# Altium PCB RGBW_controller.PcbDoc
Units mm, origin at the board's own origin, x right, y up, seen from the top; angles counter-clockwise.
Board outline 33 x 54 mm, 2 copper layers (Top Layer, Bottom Layer), stack 1.671 mm thick; 37 components, 25 nets, 136 pads, 0 vias.
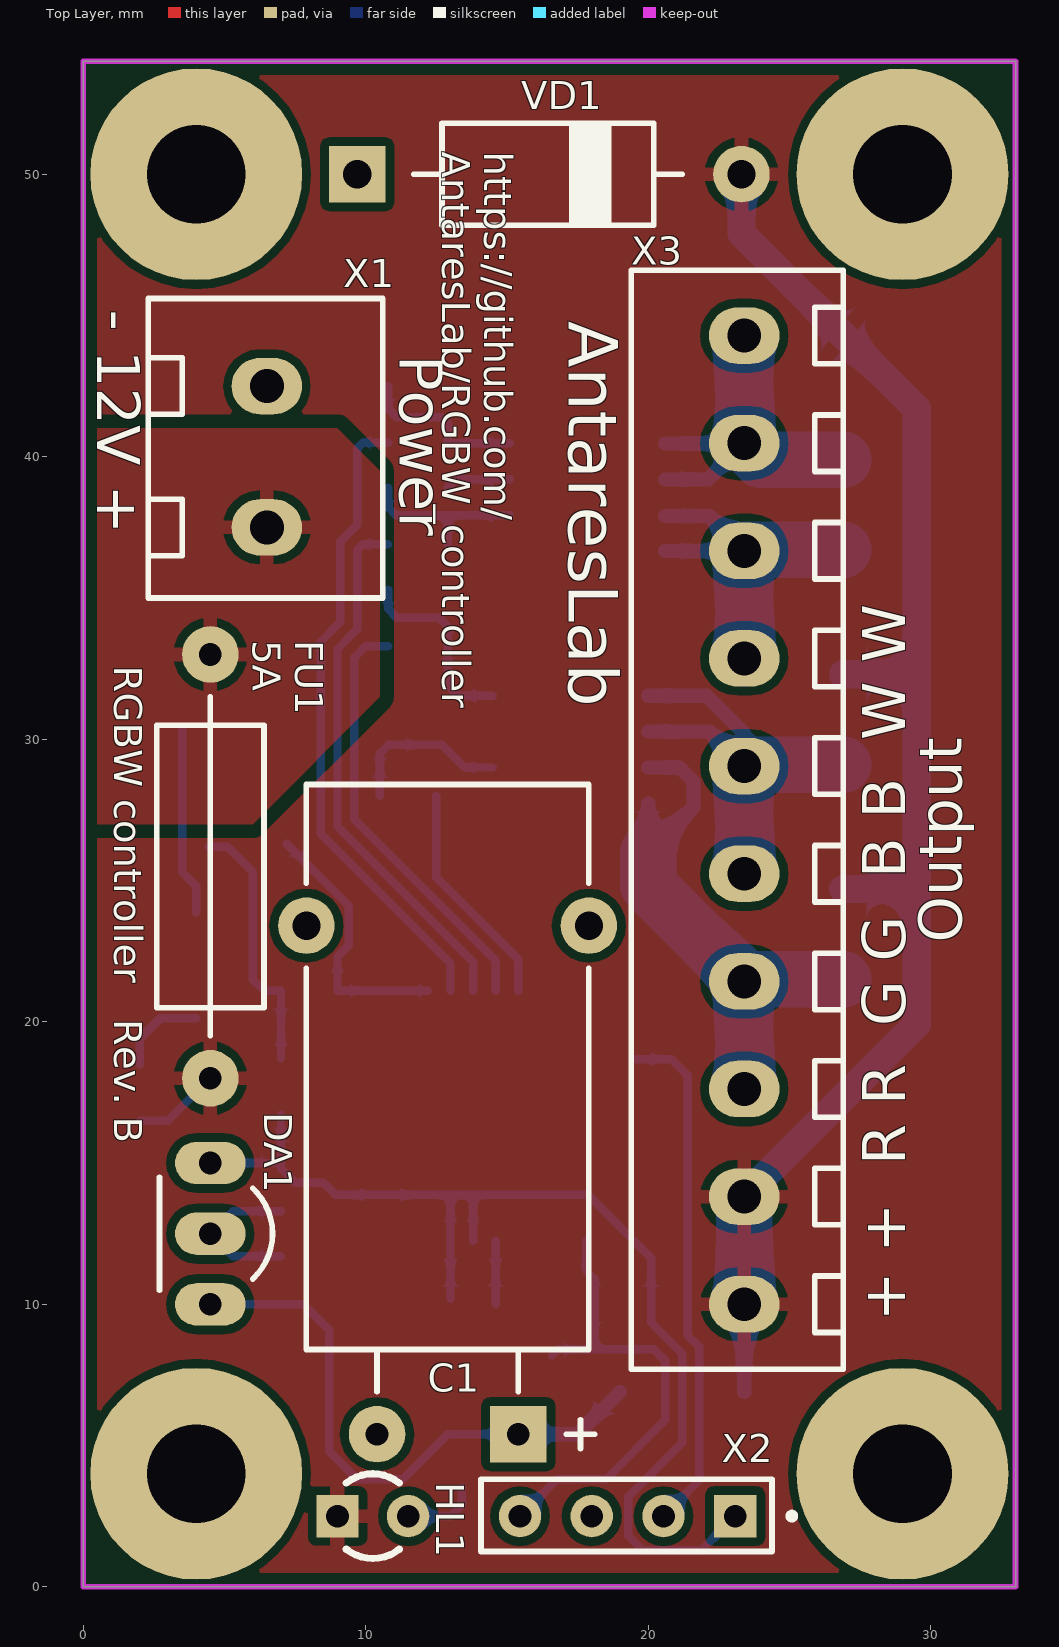
[diagram p0: Top Layer view]
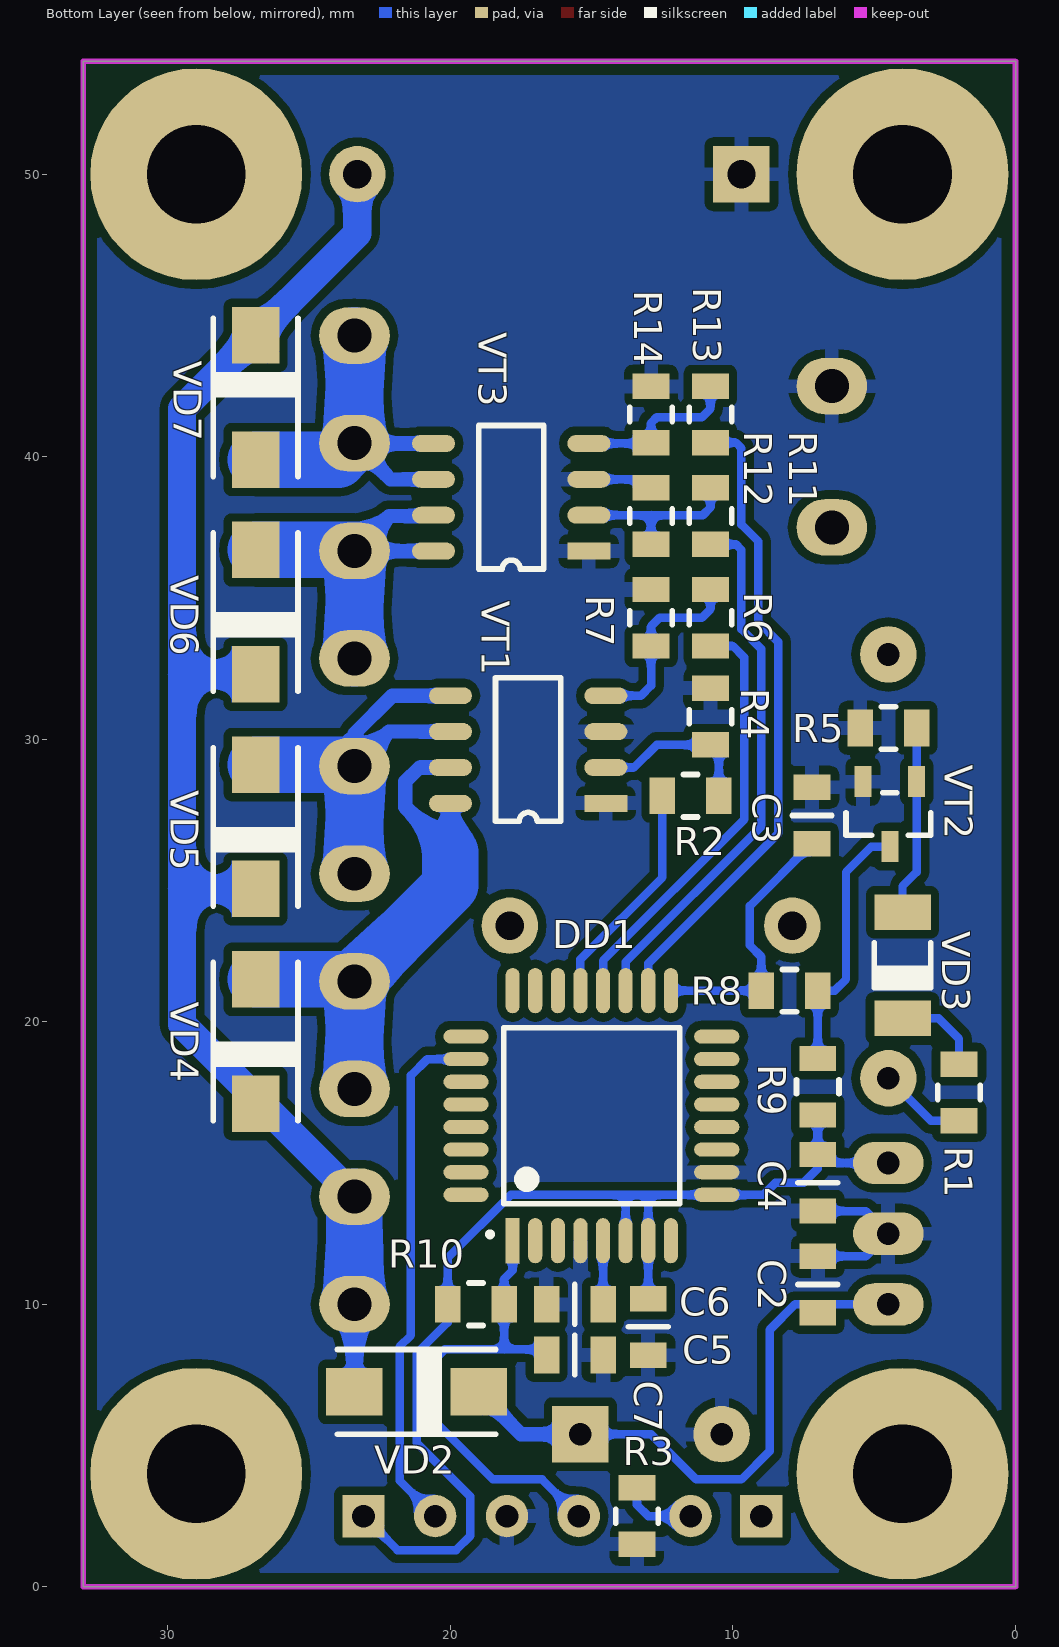
[diagram p1: Bottom Layer view, seen from below]

## Layer stack, top to bottom
Top Solder: solder mask 0.0102, Solder Resist, Dk 3.5
Top Layer: signal copper 0.0356
Dielectric 1: dielectric 1.6, FR-4, Dk 4.8
Bottom Layer: signal copper 0.0356
Bottom Solder: solder mask 0.0102, Solder Resist, Dk 3.5

## Board outline
0,0 0,54 33,54 33,0

## Design rules (kind name [scope] priority, off if disabled: settings)
Clearance [All] p1: gap=0.3 ignorepadtopadclearanceinfootprint=FALSE except(0.5: Poly-Poly)
PlaneConnect [All] p1: planeconnectstyle=Relief reliefexpansion=0.5 reliefentries=4 reliefconductorwidth=0.5 reliefairgap=0.3
PolygonConnect [All] p1: connectstyle=Relief reliefconductorwidth=0.5 reliefentries=4 polygonreliefangle="90 Angle" airgapwidth=0.3
RoutingVias [All] p1: holewidth=0.711 width=1.27 viastyle="Through Hole" minholewidth=0.711 minwidth=1.27 maxholewidth=0.711 maxwidth=1.27
SolderMaskExpansion [All] p1: expansion=0.102
Width [All] p1: maxlimit=10 minlimit=0.254 preferedwidth=0.254
29 further rules are at their usual default settings.

## Components (designator, comment, footprint, x,y, rotation, side; value= is the part's Value field where it differs from the comment)
C2 "100nF" C0805 7,10.7 r90 bottom
C3 "100nF" C0805 7.2,27.3 r90 bottom
C4 "100nF" C0805 7,14.3 r270 bottom
C5 "100nF" C0805 15.6,8.2 r0 bottom
C6 "1uF" C0805 15.6,10 r0 bottom
C7 "100nF" C0805 13,9.2 r90 bottom
DA1 "78L05" "TO92 line" 4.5,12.5 r270 top
DD1 "STM8S105K4T6" TQFP32 17.8,12.425 r90 bottom
FU1 "5A" "Fuse 4x10" 4.5,33 r270 top
HL1 "Power" "LED 3mm green" 9,2.5 r0 top
R1 "1k" R0805 2,17.5 r90 bottom
R2 "10" R0805 11.5,28 r180 bottom
R3 "2.2k" R0805 13.4,2.5 r90 bottom
R4 "10k" R0805 10.8,30.8 r270 bottom
R5 "1k" R0805 4.5,30.4 r180 bottom
R6 "10" R0805 10.8,34.3 r90 bottom
R7 "10k" R0805 12.9,34.3 r270 bottom
R8 "1k" R0805 8,21.1 r0 bottom
R9 "10k" R0805 7,17.7 r270 bottom
R10 "10k" R0805 19.1,10 r0 bottom
R11 "10" R0805 10.8,37.9 r90 bottom
R12 "10k" R0805 12.9,37.9 r270 bottom
R13 "10" R0805 10.8,41.5 r90 bottom
R14 "10k" R0805 12.9,41.5 r270 bottom
VD1 "P6KE18A" DO15 9.7,50 r0 top
VD2 "S1M" SMA 21.2,6.9 r180 bottom
VD3 "9V1" SOD80 4,22 r270 bottom
VD4 "SS34L" SMA 26.9,19.3 r270 bottom
VD5 "SS34L" SMA 26.9,26.9 r270 bottom
VD6 "SS34L" SMA 26.9,34.5 r270 bottom
VD7 "SS34L" SMA 26.9,42.1 r90 bottom
VT1 "FDS9926A" SO8 14.5,27.73 r0 bottom
VT2 "BC817" SOT23-3 3.5,28.4 r270 bottom
VT3 "FDS9926A" SO8 15.1,36.66 r0 bottom
X1 "Power" DG301-5,0-2P 6.5,42.5 r270 top
X2 "SWIM" PLS4 23.08,2.5 r180 top
X3 "Output" DG380-3,81-10P 23.4,10 r90 top

## Footprints (in the part's own frame and the unit in brackets; to place one, negate y for a bottom-side part, rotate by r counter-clockwise, add the part's x,y. Pads: shape width x height; smd on the part's side, far side on the other; paste and mask are expansions set on the pad)
C0805 [mm]
  rect 0.9x1.3 smd: 1(-1,0) 2(1,0)
  silkscreen extent 0,-0.7 0,0.7, body extent -1,-0.63 1,0.63, height 0.8
DG301-5,0-2P [mm]
  oval 2x2.5 hole 1.2: 1(0,0) 2(5,0)
  silkscreen extent -3.1,-4.2 7.5,4.1, body extent -3.1,-4.2 7.5,4.1, height 10.34
DG380-3,81-10P [mm]
  oval 2x2.5 hole 1.2: 1(0,0) 2(3.81,0) 3(7.62,0) 4(11.43,0) 5(15.24,0) 6(19.05,0) 7(22.86,0) 8(26.67,0) 9(30.48,0) 10(34.29,0)
  silkscreen extent -2.3,-3.5 36.6,4, body extent -2.22,-3.5 36.62,4, height 10
DO15 [mm]
  rect 2x2 hole 1: 1(0,0)
  round 2 hole 1: 2(13.6,0)
  silkscreen extent 2,-1.8 11.5,1.8, body extent -0.43,-1.76 14.03,1.8, height 3.78
"Fuse 4x10" [mm]
  round 2 hole 0.8: 1(0,0) 2(15,0)
  silkscreen extent 1.5,-1.9 13.5,1.9, body extent -0.25,-1.9 15.25,1.9, height 4.4
"LED 3mm green" [mm]
  rect 1.5x1.5 hole 0.8: 1(0,0)
  round 1.5 hole 0.8: 2(2.5,0)
  silkscreen extent 0.31,-1.5 2.19,1.5, body extent -0.75,-2 2.92,2, height 9.1
PLS4 [mm]
  rect 1.5x1.5 hole 0.8: 1(0,0)
  round 1.5 hole 0.8: 2(2.54,0) 3(5.08,0) 4(7.62,0)
  silkscreen extent -2.1,-1.3 9,1.25, body extent -1.27,-1.27 8.89,1.27, height 8.44
R0805 [mm]
  rect 0.9x1.3 smd: 1(-1,0) 2(1,0)
  silkscreen extent -0.25,-0.75 0.25,0.75, body extent -1,-0.62 1,0.63, height 0.5
SMA [mm]
  rect 2x1.68 smd: 1(-2.2,0) 2(2.2,0)
  silkscreen extent -2.8,-1.5 2.8,1.5, body extent -2.8,-1.47 2.8,1.48, height 2.7
SO8 [mm]
  rect 1.52x0.6 smd: 1(0,0)
  oval 1.52x0.6 smd: 2(0,-1.27) 3(0,-2.54) 4(0,-3.81) 5(5.5,-3.81) 6(5.5,-2.54) 7(5.5,-1.27) 8(5.5,0)
  silkscreen extent 1.59,-4.44 3.91,0.64, body extent -0.24,-4.33 5.75,0.57, height 1.6
SOD80 [mm]
  rect 1.25x2 smd: 1(-1.875,0) 2(1.875,0)
  silkscreen extent -0.8,-1.1 0.8,1, body extent -1.68,-0.8 1.68,0.74, height 1.52
SOT23-3 [mm]
  rect 1.1x0.6 smd: 1(-0.1,0) 2(-0.1,-1.9) 3(2.2,-0.95)
  silkscreen extent 0.3,-2.5 1.8,0.5, body extent -0.2,-2.5 2.3,0.5, height 1.1
"TO92 line" [mm]
  oval 1.5x2.5 hole 0.8: 1(-2.5,0) 2(0,0) 3(2.5,0)
  silkscreen extent -2,-1.8 2,2.2, body extent -2.8,-1.8 2.8,2.13, height 9.7
TQFP32 [mm]
  rect 1.6x0.5 smd: 1(-0.175,0)
  oval 1.6x0.5 smd: 2(-0.175,-0.8) 3(-0.175,-1.6) 4(-0.175,-2.4) 5(-0.175,-3.2) 6(-0.175,-4) 7(-0.175,-4.8) 8(-0.175,-5.6) 17(8.675,-5.6) 18(8.675,-4.8) 19(8.675,-4) 20(8.675,-3.2) 21(8.675,-2.4) 22(8.675,-1.6) 23(8.675,-0.8) 24(8.675,0)
  oval 0.5x1.6 smd: 9(1.45,-7.225) 10(2.25,-7.225) 11(3.05,-7.225) 12(3.85,-7.225) 13(4.65,-7.225) 14(5.45,-7.225) 15(6.25,-7.225) 16(7.05,-7.225) 25(7.05,1.65) 26(6.25,1.65) 27(5.45,1.65) 28(4.65,1.65) 29(3.85,1.65) 30(3.05,1.65) 31(2.25,1.65) 32(1.45,1.65)
  silkscreen extent 0,-5.92 7.37,0.85, body extent -0.35,-7.4 8.85,1.8, height 1.2

## Part data
C2 C3 C4 C5 C6 C7: library part C0805, "0805 SMD capacitors", Part Number=C0805
DA1: library part L78L, "Positive Linear Voltage Regulator", Part Number=L78L
DD1: "STM8 MCU with 16kB Flash", Part Number=STM8S105K4T6
FU1: library part Fuse_4x10, "PCB Leaded Fuse 4x10 15mm pitch", Part Number=Fuse_4x10
HL1: library part "LED 3mm green", "3mm DIP green LED", Part Number="LED 3mm green"
R1 R2 R3 R4 R5 R6 R7 R8 R9 R10 R11 R12 R13 R14: library part R0805, "0805 SMD 1/8W resistor", Part Number=R0805
VD1: "18V 600W THT Unidirectional Supressor", Part Number=P6KE18A
VD2: "1A Surface Mount Rectifier", Part Number=S1M
VD3: library part BZV55, "500mW SMD Zener Diode", Part Number=BZV55
VD4 VD5 VD6 VD7: "3A Low Case Schottky Barrier Diode", Part Number=SS34L
VT1 VT3: "Dual 20V 6.5A SO8 SMD n-MOSFET transistor with Rds=30mOhm", Part Number=FDS9926A
VT2: "45V 500mA SOT23-3 SMD NPN transistor with h21>100", Part Number=BC817
X1: library part DG301-5,0-2P, "2 pin Screw Terminal PCB Block", Part Number=DG301-5,0-2P
X2: "4 pin SWIM connector for STM8 MCU programming", Part Number=SWIM
X3: library part DG380-3,81-10P, "10 pin Screw Terminal PCB Block", Part Number=DG380-3,81-10P

## Free pads (board coordinates)
  round 7.5 hole 3.5: 0(4,4) 0(4,50) 0(29,4) 0(29,50)
  round 2 hole 1: 0(7.9,23.4) 0(17.9,23.4)
  rect 2x2 hole 0.8: 1(15.4,5.4)
  round 2 hole 0.8: 2(10.4,5.4)

## Nets (pads, with @x,y where several pads share a name; then routed paths per layer and width w, separated by ;. In a path a pad name is that pad's centre, name@x,y a point inside that pad or via, vN(x,y) a via of type N, cw(c..) or ccw(c..) an arc to the next point about the centre after c; other vN are vias at no path point)
GND: C2.2 C3.2 C4.2 C5.1 C6.2 C7.1 DA1.2 DD1.4 DD1.10 pad.2 R3.1 R4.1 R5.1 R7.1 R12.1 R14.1 VD1.1 VT1.1 VT1.3 VT2.2 VT3.1 VT3.3 X1.1 X2.3 | length 8
  Bottom Layer w0.3: C2.2 5.3,11.7 DA1.2 5.3,13.3 C4.2 ; R12.1 13.2,39.2 VT3.3
NetC1_1: C2.1 DA1.3 pad.1 VD2.2 | length 20.9
  Bottom Layer w0.3: DA1.3 7.8,10 8.7,9.1 8.7,4.8 9.7,3.8 11.3,3.8 12.9,5.4 pad.1
  Bottom Layer w0.5: pad.1 17.5,5.4 VD2.2
NetC3_1: C3.1 DD1.17 R8.2 | length 9.5
  Bottom Layer w0.3: C3.1 9.4,24.1 9.4,22.7 9,22.3 R8.2 DD1.17
NetC4_1: C4.1 C7.2 DA1.1 DD1.6 DD1.7 DD1.9 R9.2 R10.2 X2.1 | length 39.7
  Bottom Layer w0.3: DA1.1 C4.1@7,15 ; R9.2 C4.1 C4.1@7,15 ; C7.2 DD1.7 13,13.875 ; DD1.6 13.8,13.875 ; X2.1 21.88,1.3 19.8,1.3 19.3,1.8 19.3,3.2 21.2,5.1 21.2,8.251 20.1,9.351 R10.2 20.1,11.636 17.861,13.875 13.8,13.875 ; C4.1@7,15 7,14.8 7.5,14.3 8.5,14.3 8.925,13.875 DD1.9 13,13.875 ; 13,13.875 13.8,13.875
NetC5_2: C5.2 DD1.1 R10.1 X2.4 | length 16.9
  Bottom Layer w0.3: X2.4 16.76,3.8 18.5,3.8 20.6,5.9 20.6,8 20.2,8.4 18.1,8.4 ; C5.2 16.8,8.4 18.1,8.4 ; DD1.1 17.8,11.2 18.1,10.9 R10.1 18.1,8.4
NetC6_1: C6.1 DD1.5 | length 2.3
  Bottom Layer w0.3: C6.1 DD1.5
NetDD1_18: DD1.18 R13.1 | length 22.8
  Bottom Layer w0.3: R13.1 9.9,40.5 9.7,40.3 9.7,37.6 9.1,37 9.1,34.149 8.4,33.449 8.4,26.667 13,22.067 DD1.18
NetDD1_19: DD1.19 R11.1 | length 19.1
  Bottom Layer w0.3: R11.1 9.9,36.9 9.7,36.7 9.7,33.9 9,33.2 9,26.915 13.8,22.115 DD1.19
NetDD1_20: DD1.20 R6.1 | length 15.2
  Bottom Layer w0.3: R6.1 10,33.3 9.6,32.9 9.6,27.164 14.6,22.164 DD1.20
NetDD1_21: DD1.21 R2.1 | length 8.1
  Bottom Layer w0.3: R2.1 12.5,25.112 15.4,22.212 DD1.21
NetDD1_26: DD1.26 X2.2 | length 18.5
  Bottom Layer w0.3: DD1.26 20.825,18.675 21.4,18.1 21.4,8.9 21.8,8.5 21.8,3.76 X2.2
NetFU1_1: FU1.1 X1.2
NetFU1_2: FU1.2 HL1.1 R1.1 VD1.2 VD2.1 VD4.2 VD5.2 VD6.2 VD7.2 X3.1 X3.2 | length 56.5
  Bottom Layer w0.3: R1.1 3,16.5 FU1.2
  Bottom Layer w0.5: VD2.1 X3.1
  Bottom Layer w1: VD1.2 23.3,47.9 VD7.2 29.5,41.7 29.5,32.3 ; X3.2 29.5,19.91 29.5,24.7 ; VD5.2 29.5,24.7 ; VD6.2 29.5,32.3 ; 29.5,24.7 29.5,32.3
  Bottom Layer w2: X3.1 X3.2
NetHL1_2: HL1.2 R3.2 | length 2.7
  Bottom Layer w0.3: HL1.2 13,2.5 13.4,2.9 R3.2
NetR1_2: R1.2 VD3.2 | length 3.2
  Bottom Layer w0.3: R1.2 2,19.4 2.725,20.125 VD3.2
NetR2_2: R2.2 R4.2 VT1.2 | length 6
  Bottom Layer w0.3: R2.2 10.5,29.5 R4.2 12.7,29.8 13.5,29 VT1.2
NetR5_2: R5.2 VD3.1 VT2.1 | length 6.7
  Bottom Layer w0.3: R5.2 VT2.1 3.5,25.3 4,24.8 VD3.1
NetR6_2: R6.2 R7.2 VT1.4 | length 6.9
  Bottom Layer w0.3: R6.2 10.8,34.6 11.1,34.3 12.6,34.3 12.9,34 R7.2 12.9,31.9 13.26,31.54 VT1.4
NetR8_1: R8.1 R9.1 VT2.3 | length 9.3
  Bottom Layer w0.3: VT2.3 5.1,26.2 6,25.3 6,21.5 6.4,21.1 R8.1 R9.1
NetR11_2: R11.2 R12.2 VT3.2 | length 6.1
  Bottom Layer w0.3: R11.2 10.8,38.2 11.07,37.93 12.9,37.93 ; R12.2 12.9,37.93 ; VT3.2 12.9,37.93
NetR13_2: R13.2 R14.2 VT3.4 | length 6
  Bottom Layer w0.3: R13.2 10.8,41.7 11.1,41.4 12.7,41.4 12.9,41.2 R14.2 12.93,40.47 VT3.4
NetVD4_1: VD4.1 VT1.7 VT1.8 X3.3 X3.4 | length 20
  Bottom Layer w0.5: VT1.8 20,26 21.6,27.6 21.6,28.5 21.1,29 VT1.7
  Bottom Layer w2: 20,26 20,24.83 X3.4 ; X3.3 X3.4 ; VD4.1 23.47,21.5 X3.4
NetVD5_1: VD5.1 VT1.5 VT1.6 X3.5 X3.6 | length 16.4
  Bottom Layer w0.5: VT1.6 22.18,30.27 X3.6 23.4,30.2 22.06,31.54 VT1.5
  Bottom Layer w1: X3.5@23.37,25.27 X3.5
  Bottom Layer w2: X3.5 X3.6 23.45,29.1 VD5.1
NetVD6_1: VD6.1 VT3.7 VT3.8 X3.7 X3.8 | length 13.4
  Bottom Layer w0.5: VT3.8 X3.8@23.39,36.66 ; VT3.7@20.6,37.9 22.17,37.9 X3.8
  Bottom Layer w1: X3.8@23.39,36.66 X3.8
  Bottom Layer w2: X3.7 X3.8 23.43,36.7 VD6.1
NetVD7_1: VD7.1 VT3.5 VT3.6 X3.9 X3.10 | length 13.7
  Bottom Layer w0.5: VT3.6 22.12,39.2 23.39,40.47 VT3.5
  Bottom Layer w1: X3.9@23.39,40.47 X3.9
  Bottom Layer w2: X3.10@23.41,44.3 X3.10 X3.9 23.98,39.9 VD7.1
pads on no net: DD1.2 DD1.3 DD1.8 DD1.11 DD1.12 DD1.13 DD1.14 DD1.15 DD1.16 DD1.22 DD1.23 DD1.24 DD1.25 DD1.27 DD1.28 DD1.29 DD1.30 DD1.31 DD1.32

## Polygon pours and split planes (outlines as drawn)
NetFU1_1 on Top Layer "Bottom Layer-No Net" (solid, remove dead copper, pour order 20): 0.5,27 6,27 10.5,31.5 10.5,39.5 9,41 0.5,41
NetFU1_2 on Top Layer "Bottom Layer-No Net" (solid, remove dead copper, pour order 22): 0.5,53.5 32.5,53.5 32.5,0.5 0.5,0.5
GND on Bottom Layer "Top Layer-No Net" (solid, remove dead copper, pour order 32): 0.5,53.5 32.5,53.5 32.5,0.5 0.5,0.5

## Keep-outs
Keep-Out Layer:
  the board outline again, w0.2

## Silkscreen, mask and mechanical layers (free items; w line width, h text height)
Top Overlay:
  lines w0.2: 7.9,21.9 7.9,8.4 17.9,8.4 17.9,21.9 ; 7.9,24.9 7.9,28.4 17.9,28.4 17.9,24.9 ; 10.4,6.9 10.4,8.4 ; 15.4,6.9 15.4,8.4 ; 17.092,5.4 18.108,5.4 ; 17.6,4.892 17.6,5.908
  text "https://github.com/ / AntaresLab/RGBW_controller" at 12.7,50.8 h1 r270
  text "- 12V +" at 0.5,45.2 h1.52 r270
  text "AntaresLab" at 16.6,44.8 h3 r270
  text "Power" at 11.2,43.6 h1.52 r270
  text "5A" at 6,33.5 h1 r270
  text "RGBW controller   Rev. B" at 1.1,32.6 h1 r270
  text "Output" at 31.1,22.8 h1.52 r90
  text "+ +  R R  G G  B B  W W" at 29.1,9.4 h1.52 r90
  text "C1" at 12.2,6.9 h1